# EAGLE board Hat_Layout_1.2 (EAGLE 9.6.2)
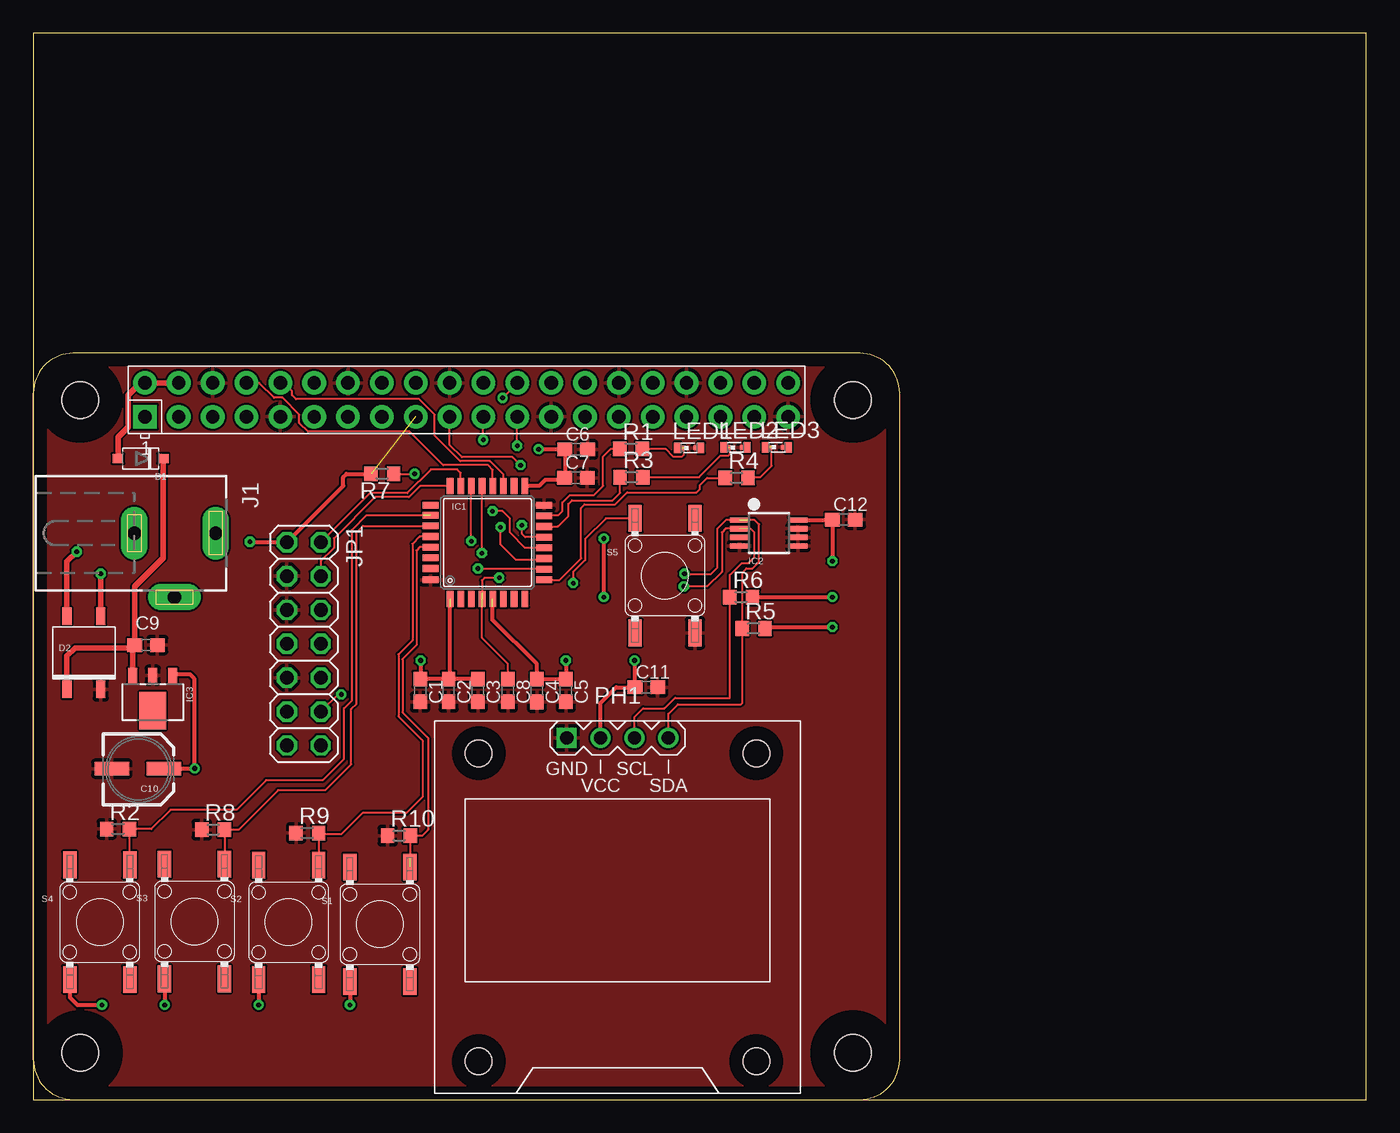
[diagram p0: board, top side]
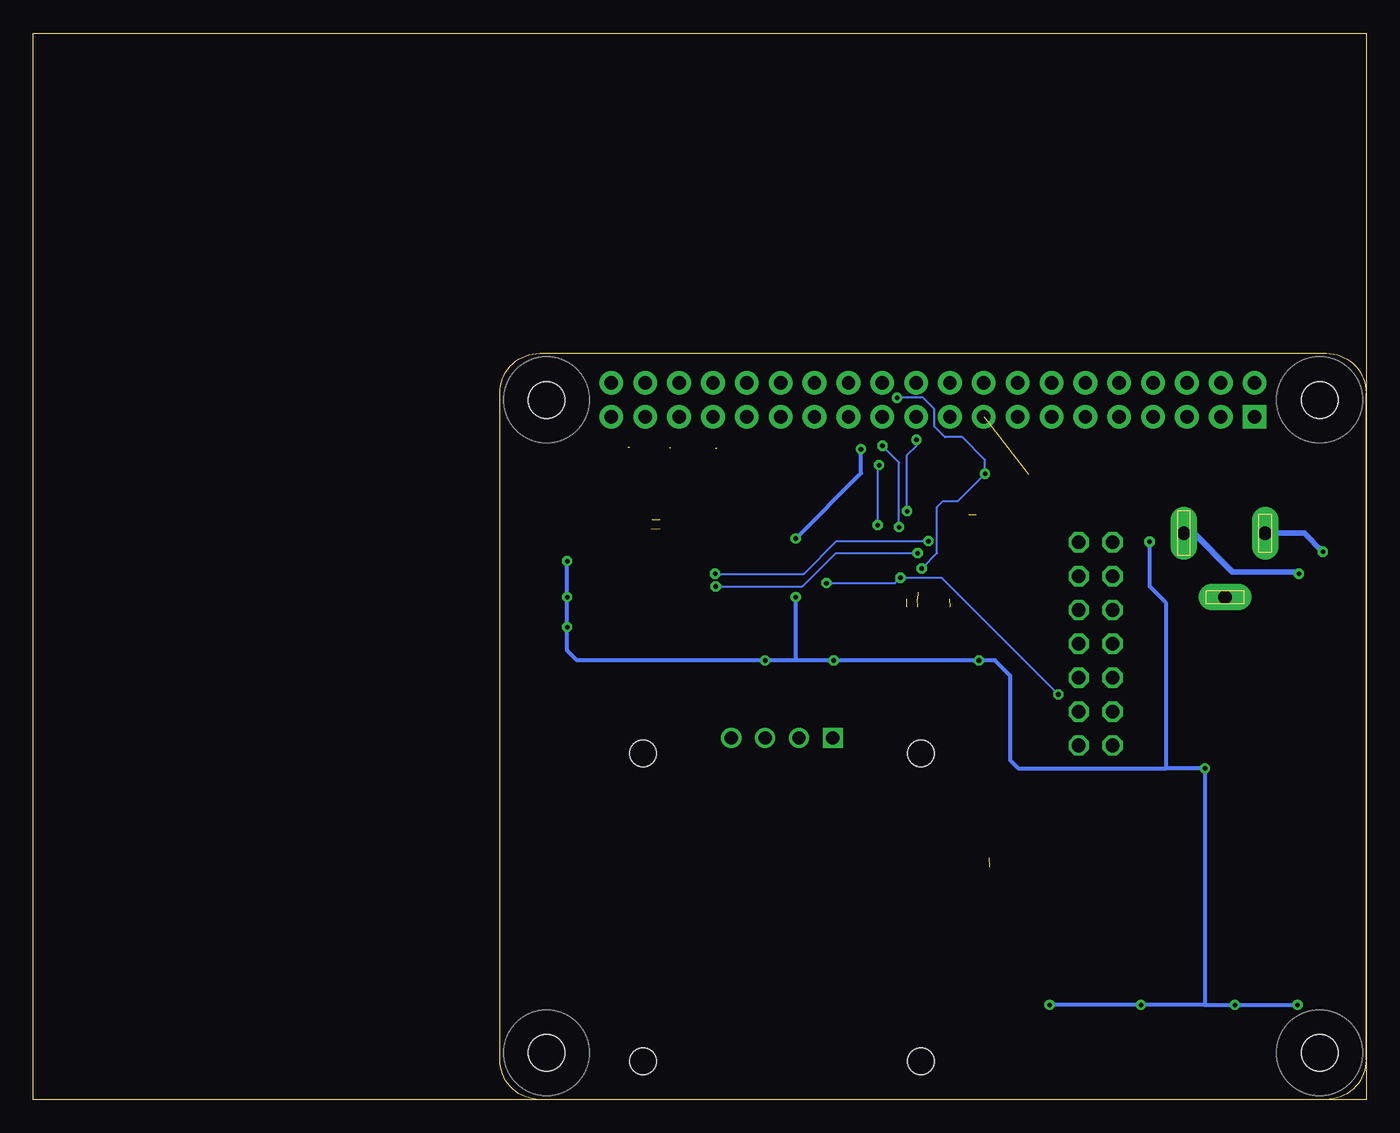
[diagram p1: board, bottom side, seen from below]

Size 100 x 80 mm. Coordinates in mm from the lower left corner, seen from the top.
Outline: 0,0 100,0 100,80 0,80 0,0
Copper layers (1*16): Top 0.035mm / dielectric 1.5mm / Bottom 0.035mm
Design rules "default": minimum track width 6mil, minimum drill 0.35mm, track to track 6mil, track to pad 6mil, pad to pad 6mil, via to via 6mil, smd to smd 6mil, copper to edge 40mil, drill to drill 6mil, minimum pad ring 10mil, minimum via ring 8mil, stop-mask expansion 4mil, vias tented up to drill 0mil, thermal gap 10mil

## Footprints (pad centres in the part's own frame; a part is rotated, then mirrored left to right if it is on the bottom)
C0603 = smd 1.1 x 1: 1 -0.85,0; 2 0.85,0
WX5MM = smd 2.6 x 1: + -1.95,0; - 1.95,0
SOD123 = smd 0.8 x 0.7: A 1.7,0; K -1.7,0
MINIDIL = smd 0.7 x 1.3: 3 1.27,2.74; 4 -1.27,2.74; + -1.27,-2.74; - 1.27,-2.74
LQPF32 = smd 0.5 x 1.2: 1 -2.8,-4.25; 2 -2,-4.25; 3 -1.2,-4.25; 4 -0.4,-4.25; 5 0.4,-4.25; 6 1.2,-4.25; 7 2,-4.25; 8 2.8,-4.25; 17 2.8,4.25; 18 2,4.25; 19 1.2,4.25; 20 0.4,4.25; 21 -0.4,4.25; 22 -1.2,4.25; 23 -2,4.25; 24 -2.8,4.25 | smd 1.2 x 0.5: 9 4.25,-2.8; 10 4.25,-2; 11 4.25,-1.2; 12 4.25,-0.4; 13 4.25,0.4; 14 4.25,1.2; 15 4.25,2; 16 4.25,2.8; 25 -4.25,2.8; 26 -4.25,2.05; 27 -4.25,1.25; 28 -4.25,0.45; 29 -4.25,-0.35; 30 -4.25,-1.15; 31 -4.25,-1.95; 32 -4.25,-2.8
MSOP8_0.65MM = smd 0.4 x 1.4: 1 -0.975,-2.2; 2 -0.325,-2.2; 3 0.325,-2.2; 4 0.975,-2.2; 5 0.975,2.2; 6 0.325,2.2; 7 -0.325,2.2; 8 -0.975,2.2
SOT89R = smd 0.7 x 1.1: 1 -1.5,-1.75; 2 0,-1.756; 3 1.5,-1.75 | smd 2 x 2.8: 4 0,0.9
DCJ0202 = drill 1 pad 2 long: 1 0,3.1; 2 4.8,0; 3 0,-3
2X07 = drill 1.016 octagon: 1 -7.62,-1.27; 2 -7.62,1.27; 3 -5.08,-1.27; 4 -5.08,1.27; 5 -2.54,-1.27; 6 -2.54,1.27; 7 0,-1.27; 8 0,1.27; 9 2.54,-1.27; 10 2.54,1.27; 11 5.08,-1.27; 12 5.08,1.27; 13 7.62,-1.27; 14 7.62,1.27
SMARTLED-TTW = smd 0.8 x 0.5: A 0,-0.875; C 0,0.875 | smd 0.35 x 0.35: A@1 0,-0.5; C@1 0,0.5
DISPLAY-OLED-128X64-I2C = drill 1 square: 1 -3.81,12.7 | drill 1: 2 -1.27,12.7; 3 1.27,12.7; 4 3.81,12.7 | hole 2: -10.414,11.557; 10.414,11.557; 10.414,-11.557; -10.414,-11.557
R0603 = smd 1 x 1.1: 1 -0.85,0; 2 0.85,0
FSM4JSMATR = smd 1 x 2: 1 -2.25,-4.3; 2 2.25,-4.3; 3 2.25,4.3; 4 -2.25,4.3
RASPI_BOARD_B+HAT = drill 1 pad 1.778 square: 1 8.37,51.23 | drill 1 pad 1.778: 2 8.37,53.77; 3 10.91,51.23; 4 10.91,53.77; 5 13.45,51.23; 6 13.45,53.77; 7 15.99,51.23; 8 15.99,53.77; 9 18.53,51.23; 10 18.53,53.77; 11 21.07,51.23; 12 21.07,53.77; 13 23.61,51.23; 14 23.61,53.77; 15 26.15,51.23; 16 26.15,53.77; 17 28.69,51.23; 18 28.69,53.77; 19 31.23,51.23; 20 31.23,53.77; 21 33.77,51.23; 22 33.77,53.77; 23 36.31,51.23; 24 36.31,53.77; 25 38.85,51.23; 26 38.85,53.77; 27 41.39,51.23; 28 41.39,53.77; 29 43.93,51.23; 30 43.93,53.77; 31 46.47,51.23; 32 46.47,53.77; 33 49.01,51.23; 34 49.01,53.77; 35 51.55,51.23; 36 51.55,53.77; 37 54.09,51.23; 38 54.09,53.77; 39 56.63,51.23; 40 56.63,53.77 | hole 2.75: 3.5,3.5; 3.5,52.5; 61.5,3.5; 61.5,52.5

## Placement (x,y rotation side)
C1  4.7uF  [C0603]  29.03,30.69 270 top
C2  100nF  [C0603]  31.15,30.69 270 top
C3  100nF  [C0603]  33.35,30.69 270 top
C4  1uF  [C0603]  37.78,30.68 270 top
C5  100nF  [C0603]  39.95,30.69 270 top
C6  4.7uF  [C0603]  40.73,48.78 0 top
C7  100nF  [C0603]  40.71,46.65 0 top
C8  100nF  [C0603]  35.6,30.69 270 top
C9  100nF  [C0603]  8.46,34.1 0 top
C10  4.7uF  [WX5MM]  7.84,24.82 180 top
C11  100nF  [C0603]  45.99,30.93 0 top
C12  100nF  [C0603]  60.81,43.51 0 top
D1  MBR0530  [SOD123]  8.05,48.1 180 top
D2  MB05S  [MINIDIL]  3.79,33.52 0 top
IC1  STM32F042K4T6  [LQPF32]  34.07,41.79 0 top
IC2  MCP9808-E/MS  [MSOP8_0.65MM]  55.18,42.51 270 top
IC3  LD1117DT33TR  [SOT89R]  8.96,30.07 180 top
J1  DCJ0202  [DCJ0202]  10.58,42.49 270 top
JP1  2x7 Pinhead  [2X07]  20.29,34.19 270 top
LED1  RED  [SMARTLED-TTW]  49.21,48.89 270 top
LED2  GREEN  [SMARTLED-TTW]  52.68,48.93 270 top
LED3  YELLOW  [SMARTLED-TTW]  55.78,48.95 270 top
PH1  SBC-OLED  [DISPLAY-OLED-128X64-I2C]  43.83,14.43 0 top
R1  130R  [R0603]  44.84,48.83 0 top
R2  10k  [R0603]  6.35,20.3 0 top
R3  130R  [R0603]  44.87,46.7 0 top
R4  130R  [R0603]  52.77,46.65 0 top
R5  4.7k  [R0603]  54.04,35.35 0 top
R6  4.7k  [R0603]  53.11,37.7 0 top
R7  10k  [R0603]  26.18,46.95 180 top
R8  10k  [R0603]  13.49,20.25 0 top
R9  10k  [R0603]  20.56,20 0 top
R10  10k  [R0603]  27.43,19.8 0 top
S1  FSM4JSMATR  [FSM4JSMATR]  26,13.15 180 top
S2  FSM4JSMATR  [FSM4JSMATR]  19.15,13.3 180 top
S3  FSM4JSMATR  [FSM4JSMATR]  12.09,13.36 180 top
S4  FSM4JSMATR  [FSM4JSMATR]  4.99,13.31 180 top
S5  FSM4JSMATR  [FSM4JSMATR]  47.39,39.31 180 top
X1  RASPI_B+_HAT  [RASPI_BOARD_B+HAT]  0,0 0 top

## Library data of the parts
C1-C9 C11 C12 = rcl; SPICEPREFIX: C
C10 D1 D2 IC2 IC3 PH1 S1-S5 X1 = TempSensor_Rev1.1
IC1 = STM32; OC_FARNELL: 3365388
J1 = con-jack; OC_FARNELL: unknown; OC_NEWARK: unknown
JP1 = pinhead
LED1-LED3 = led
R1-R10 = rcl; SPICEPREFIX: R

## Nets
!SPI_CE0: IC1.10 R7.1 X1.24
+3V3: C1.1 C2.1 C3.1 C4.1 C5.1 C6.1 C7.1 C10.+ C11.1 C12.1 IC1.1 IC1.5 IC1.17 IC2.8 IC3.1 JP1.1 PH1.2 R5.2 R6.2 R7.2 S1.3 S2.3 S3.3 S4.3 X1.1 X1.17
+5V_RPI: D1.A X1.2 X1.4
GND: C1.2 C2.2 C3.2 C4.2 C5.2 C6.2 C7.2 C8.2 C9.2 C10.- C11.2 C12.2 D2.- IC1.16 IC1.32 IC2.4 IC2.5 IC2.6 IC2.7 IC3.2 JP1.3 JP1.5 JP1.9 LED1.C@1 LED2.C@1 LED3.C@1 PH1.1 R2.1 R8.1 R9.1 R10.1 S5.4 X1.6 X1.9 X1.14 X1.20 X1.25 X1.30 X1.34 X1.39
I2C_SCL: IC1.21 IC2.2 PH1.3 R6.1
I2C_SDA: IC1.22 IC2.1 PH1.4 R5.1
LED_GREEN: IC1.14 R3.1
LED_RED: IC1.15 R1.1
LED_YELLOW: IC1.9 R4.1
N$1: LED1.A@1 R1.2
N$2: LED2.A@1 R3.2
N$3: LED3.A@1 R4.2
N$4: D2.4 J1.3
N$5: D2.3 J1.1
RESET: C8.1 IC1.4 JP1.12 S5.2
SPI_CLK: IC1.11 X1.23
SPI_MISO: IC1.12 X1.21
SPI_MOSI: IC1.13 X1.19
SW1: IC1.29 R10.2 S1.1
SW2: IC1.28 R9.2 S2.1
SW3: IC1.27 R8.2 S3.1
SW4: IC1.26 R2.2 S4.1
SWCLK: IC1.24 JP1.4
SWDIO: IC1.23 JP1.2
USART_RX: IC1.20 X1.8
USART_TX: IC1.19 X1.10
V_IN: C9.1 D1.K D2.+ IC3.3

## Tracks (layer width: path | path; a pad name or v marks a point on that pad's centre or on a via)
!SPI_CE0  (via drill 0.35)
  Top 0.152: v33.35,39.85 33.41,39.79 IC1.10 | v35.2,52.65 X1.24 | R7.1 v28.6,46.95
  Bottom 0.152: v33.35,39.85 32.2,41 32.2,44.45 31.75,44.9 30.65,44.9 v28.6,46.95 28.6,48 30.3,49.7 31.6,49.7 32.4,50.5 32.4,51.8 33.25,52.65 v35.2,52.65
+3V3  (via drill 0.35)  (3 unrouted)
  Top 0.152: C2.1 31.25,31.64 | C4.1 | 39.88,46.67 C7.1 | C10.+ 9.87,24.9 11.4,24.9 | 60,43.47 C12.1 | 18.98,41.85 JP1.1 | R6.2 54.31,38.05 | R5.2 54.99,35.45 | S4.3 2.85,8.9
  Top 0.305: C3.1 C2.1 C1.1 29.05,31.56 v29.05,32.95 | 31.25,31.64 31.25,36.95 | C4.1 C5.1 v39.95,32.95 | C4.1 37.78,32.67 34.45,36 34.45,36.95 | 39.88,46.67 C6.1 39.86,48.8 v37.9,48.8 | C7.1 39.71,46.5 38.4,46.5 37.94,46.04 IC1.17 | v16.25,41.85 18.98,41.85 | JP1.1 23.25,46.04 23.25,46.7 23.5,46.95 R7.2 | 54.99,35.45 v59.95,35.45 | C10.+ 9.82,24.85 v12.1,24.85 12.1,31.55 11.75,31.9 10.54,31.9 IC3.1 | S4.3 2.74,7.66 3.3,7.1 v5.15,7.1 | S3.3 v9.84,7.11 v9.85,7.1 | S2.3 v16.9,7.1 | S1.3 v23.75,7.1 | v42.8,37.7 v42.8,42.1 | PH1.2 42.56,29.76 43.73,30.93 C11.1 45.14,32.91 v45.1,32.95 | R6.2 v59.95,37.7 | IC2.8 59.94,43.48 C12.1 v59.96,40.41 v59.95,40.4
  Bottom 0.152: v39.95,32.95
  Bottom 0.305: 15,24.85 v12.1,24.85 12.1,7.1 | 15,24.85 26.1,24.85 26.7,25.45 26.7,31.8 27.85,32.95 v29.05,32.95 v39.95,32.95 | 15,24.85 15,37.25 16.25,38.5 v16.25,41.85 | v39.95,32.95 42.8,32.95 | 42.8,32.95 v45.1,32.95 59.2,32.95 59.95,33.7 v59.95,35.45 v59.95,37.7 v59.95,40.4 | 12.1,7.1 v16.9,7.1 v23.75,7.1 | 12.1,7.1 v9.85,7.1 v5.15,7.1 | 42.8,32.95 v42.8,37.7 | v42.8,42.1 37.9,47 v37.9,48.8
+5V_RPI
  Top 0.406: X1.4 X1.2 8.02,53.77 7.1,52.85 7.1,50.45 6.35,49.7 D1.A
GND
  pour Top: 0.1,56.5 65.15,56.5 65.15,0.05 0,0.05 0,56.5
I2C_SCL  (via drill 0.35)  (1 unrouted)
  Top 0.152: PH1.3 45.1,28.7 45.75,29.35 47.35,29.35 48.15,30.15 52.25,30.15 52.26,30.16 R6.1 52.26,39.36 53.15,40.25 53.65,40.25 54.1,40.7 54.1,42.55 53.85,42.8 53.65,42.8 | IC2.2 51.94,42.84 51.65,42.55 51.65,39.6 50.55,38.5 v48.8,38.5 | v33.65,41 33.65,46.02 IC1.21
  Bottom 0.152: v48.8,38.5 42.3,38.5 39.8,41 v33.65,41
I2C_SDA  (via drill 0.35)  (1 unrouted)
  Top 0.152: PH1.4 47.64,28.94 48.35,29.65 53.1,29.65 53.19,29.74 R5.1 53.19,39.54 53.5,39.85 53.95,39.85 54.45,40.35 54.45,43.15 54.1,43.5 53.6,43.5 | IC2.1 51.98,43.48 51.3,42.8 51.3,39.9 50.8,39.4 48.9,39.4 v48.85,39.45 | v32.85,41.9 32.85,46.02 IC1.22
  Bottom 0.152: v48.85,39.45 42.2,39.45 39.75,41.9 v32.85,41.9
LED_GREEN
  Top 0.152: IC1.14 39.35,43 40.15,43.8 40.15,44.7 40.4,44.95 43.45,44.95 44.02,45.52 R3.1
LED_RED
  Top 0.152: R1.1 43.33,48.83 42.75,48.25 42.75,46.05 42.05,45.35 40.25,45.35 39.7,44.8 39.7,44.15 39.4,43.85 38.38,43.85 IC1.15
LED_YELLOW
  Top 0.152: IC1.9 39.49,38.99 41.1,40.6 41.1,44.4 41.34,44.65 43.65,44.65 44.55,45.55 49.75,45.55 50,45.8 50,46.1 50.55,46.65 R4.1
N$1  (1 unrouted)
  Top 0.152: 48.81,48.89 48.81,48.4 48.68,48.26 47.99,48.26 47.42,48.83 R1.2
N$2  (1 unrouted)
  Top 0.152: R3.2 49.95,46.7 51.55,48.3 52.15,48.3 52.28,48.44 52.28,48.93
N$3  (1 unrouted)
  Top 0.152: R4.2 53.67,46.7 54.55,46.7 55.38,47.53 55.38,48.95
N$4  (via drill 0.35)
  Top 0.406: D2.4 2.52,40.37 v3.25,41.1
  Bottom 0.406: v3.25,41.1 4.64,42.49 J1.3
N$5  (via drill 0.35)
  Top 0.152: v5.06,39.44 v5.05,39.45
  Top 0.406: D2.3 v5.06,39.44
  Bottom 0.406: v5.05,39.45 5.2,39.6 10.05,39.6 12.94,42.49 J1.1
RESET  (via drill 0.35)  (2 unrouted)
  Top 0.152: C8.1 35.6,32.7 33.65,34.65 33.65,36.95 | S5.2 42.96,43.61 41.41,42.05 41.41,40.47 40.5,39.57 v40.5,38.75 | v34.95,39.15 33.85,39.15 33.65,38.95 33.65,38.05 | JP1.12 22.85,30.4 v23.1,30.4
  Bottom 0.152: v40.5,38.75 35.35,38.75 v34.95,39.15 31.85,39.15 v23.1,30.4
SPI_CLK  (via drill 0.35)
  Top 0.152: IC1.11 38.23,40.5 36.2,40.5 35.05,41.65 v35.05,42.95 | v36.3,49.05 X1.23
  Bottom 0.152: v35.05,42.95 35.05,47.8 v36.3,49.05
SPI_MISO  (via drill 0.35)
  Top 0.152: IC1.12 36.91,41.39 35.75,42.55 35.75,43.6 35.2,44.15 v34.44,44.15 | v33.75,49.5 33.75,51.21 X1.21
  Bottom 0.152: v34.44,44.15 34.44,48.36 33.75,49.05 v33.75,49.5
SPI_MOSI  (via drill 0.35)
  Top 0.152: IC1.13 36.91,42.19 36.65,42.45 v36.65,43.1 | v36.55,47.6 35.95,48.2 32.15,48.2 31.23,49.12 X1.19
  Bottom 0.152: v36.65,43.1 36.65,47.5 v36.55,47.6
SW1  (1 unrouted)
  Top 0.152: IC1.29 28.99,41.44 28.75,41.2 28.75,34.1 27.7,33.05 27.7,29.05 29.6,27.15 29.6,20.25 29.15,19.8 R10.2 28.28,17.48 S1.1 | 28.28,18.13 28.25,18.1 28.15,18.2
SW2
  Top 0.152: IC1.28 28.99,42.24 28.45,41.7 28.45,34.45 27.39,33.4 27.39,28.75 29.2,26.95 29.2,22.7 28,21.5 24.7,21.5 23.1,19.9 21.51,19.9 R9.2 S2.1
SW3
  Top 0.152: IC1.27 24.74,43.04 24.25,42.55 24.25,29.7 23.85,29.3 23.85,25.15 21.9,23.2 18.35,23.2 15.4,20.25 R8.2 S3.1
SW4  (1 unrouted)
  Top 0.152: 29.25,43.85 25,43.85 23.9,42.75 23.9,29.95 23.3,29.35 23.3,25.55 21.7,23.95 17.45,23.95 15.25,21.75 10.3,21.75 8.85,20.3 R2.2 7.2,17.65 S4.1
SWCLK
  Top 0.152: IC1.24 29.02,46.04 28.18,45.2 25.64,45.2 22.55,42.1 22.55,41.4 21.56,40.41 JP1.4
SWDIO
  Top 0.152: IC1.23 32.07,47.02 31.8,47.29 29.84,47.29 28.05,45.5 25.25,45.5 JP1.2
USART_RX
  Top 0.152: IC1.20 34.47,47.25 34.13,47.59 30.75,47.59 28.23,50.11 20.61,50.11 19.95,50.77 19.95,51.39 18.69,52.65 18.07,52.65 16.95,53.77 X1.8
USART_TX
  Top 0.152: IC1.19 35.27,46.88 34.26,47.9 32.02,47.9 30.11,49.81 30.11,51.39 28.95,52.55 19.7,52.55 19.4,52.85 19.4,53.15 18.78,53.77 X1.10
V_IN
  Top 0.152: C9.1 7.41,33.9 7.45,33.9 | 8.11,33.9 7.45,33.9 | 7.46,33.89 7.45,33.9
  Top 0.406: D2.+ 2.52,33.27 3.15,33.9 7.41,33.9 | IC3.3 7.46,33.89 | C9.1 7.61,38.51 9.75,40.65 D1.K